# EAGLE board board (EAGLE 9.0.1)
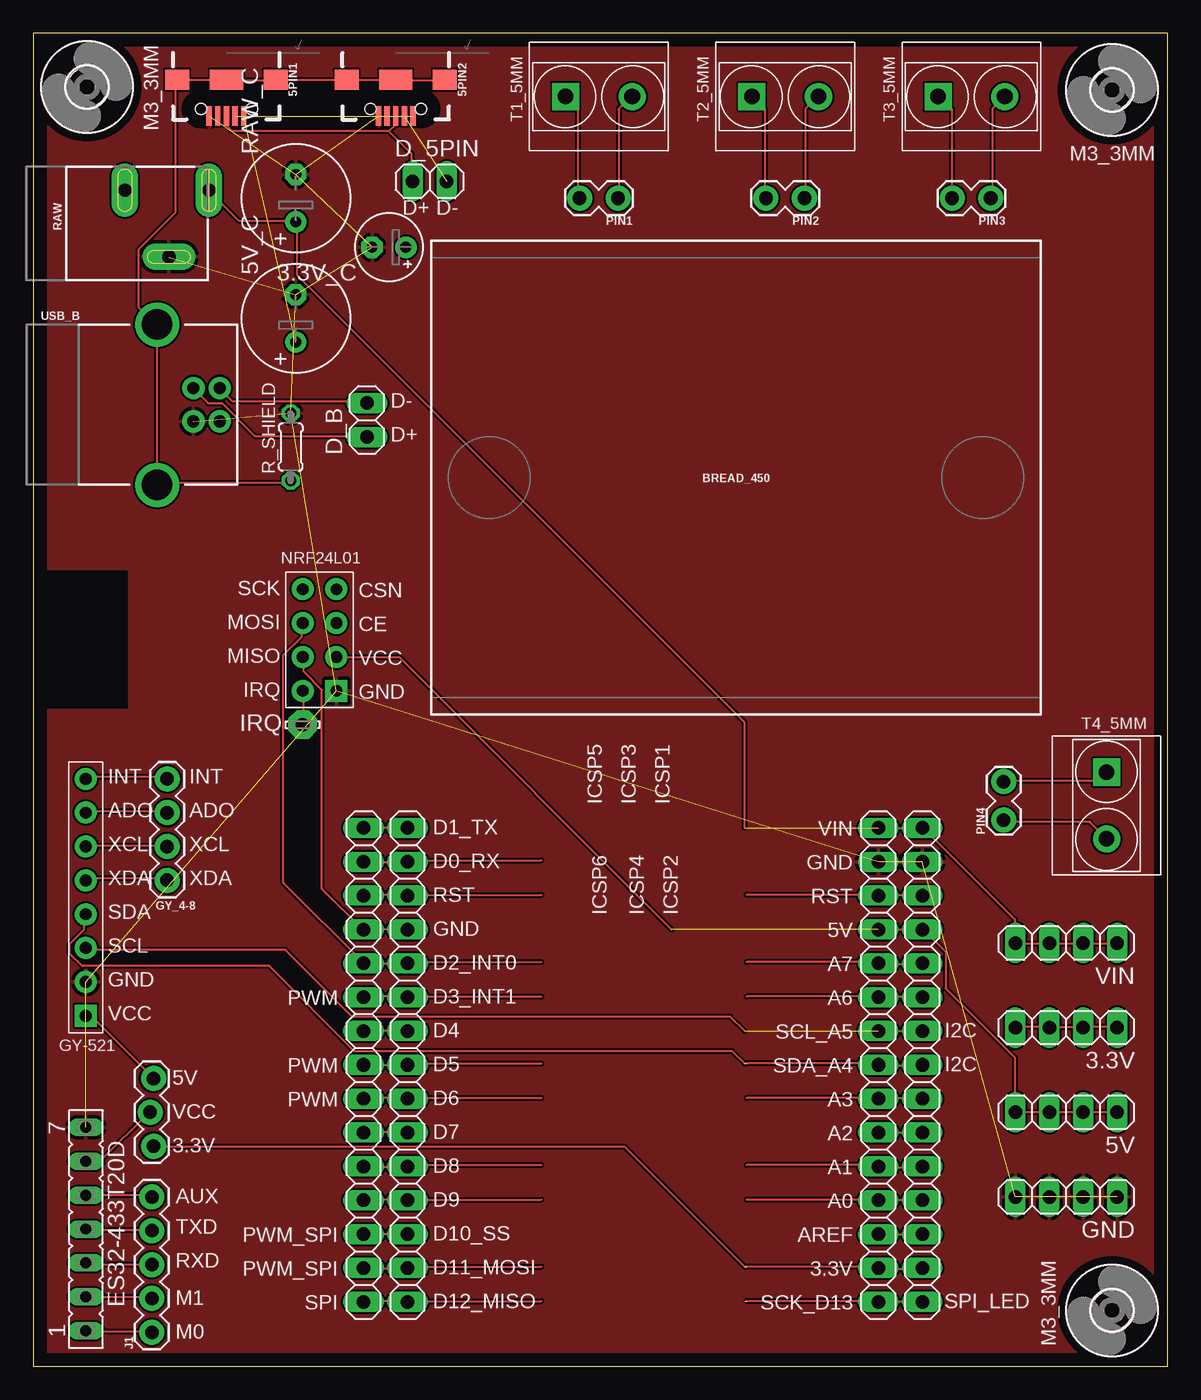
[diagram p0: board, top side]
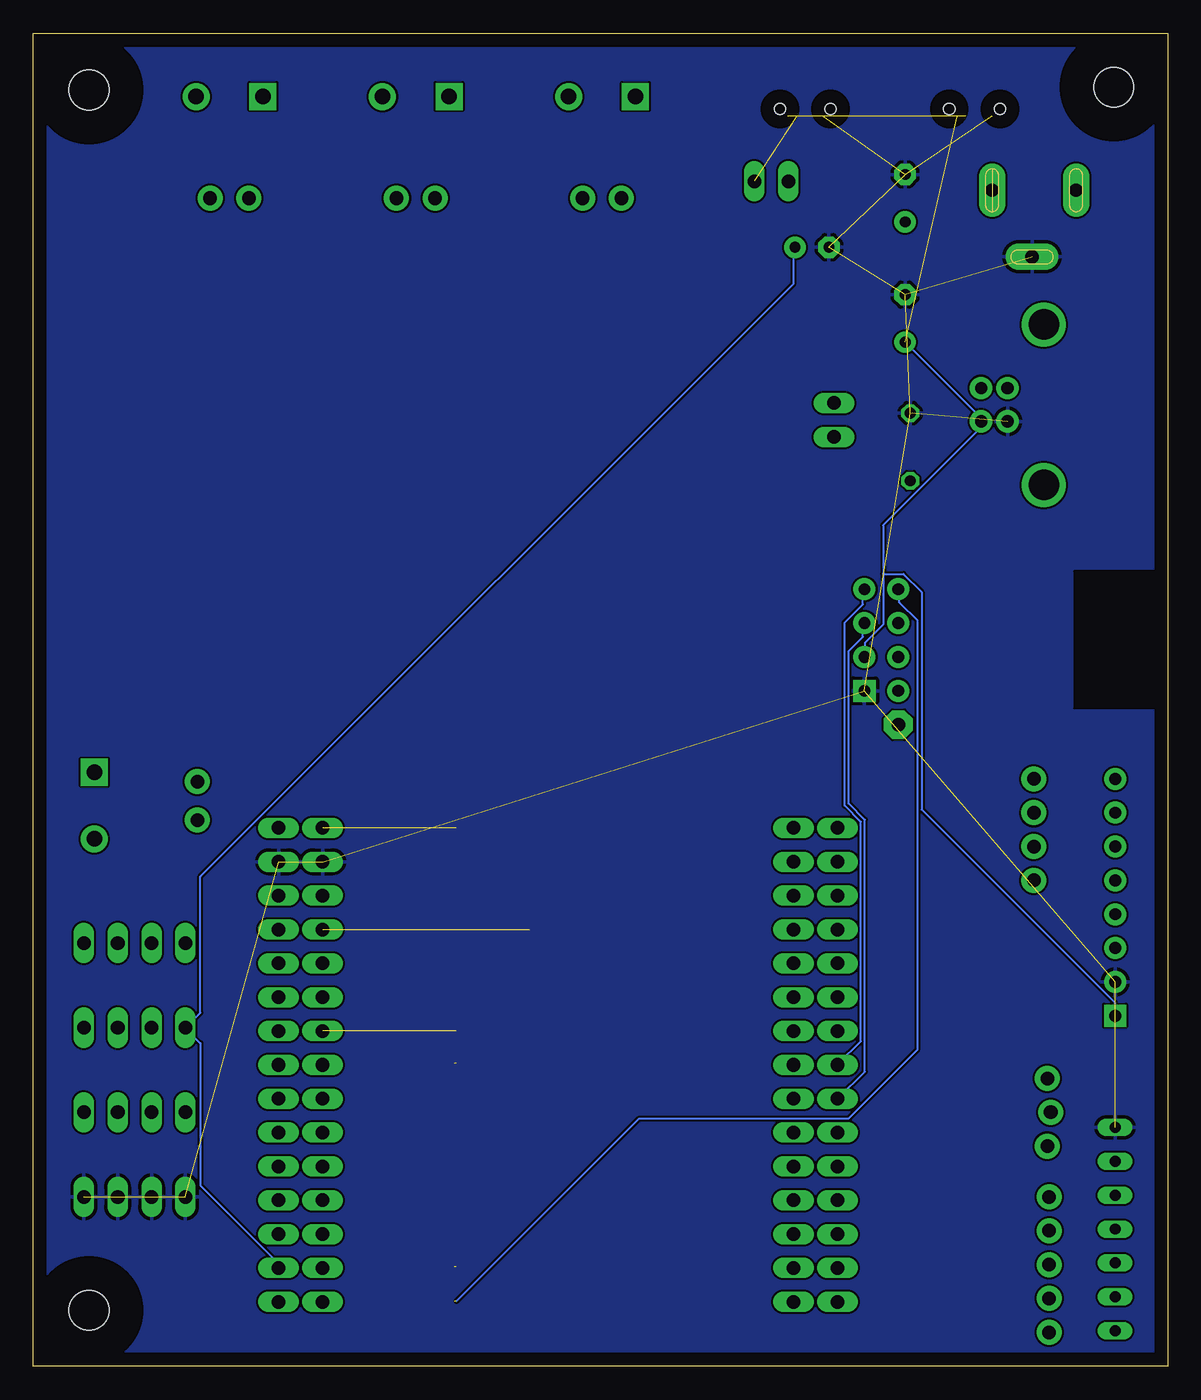
[diagram p1: board, bottom side, seen from below]

Size 85.07 x 100 mm. Coordinates in mm from the lower left corner, seen from the top.
Outline: 0,0 85.07,0 85.07,100 0,100 0,0
Copper layers (1*16): Top 0.035mm / dielectric 1.5mm / Bottom 0.035mm
Design rules "default": minimum track width 6mil, minimum drill 0.35mm, track to track 6mil, track to pad 6mil, pad to pad 6mil, via to via 6mil, smd to smd 6mil, copper to edge 40mil, drill to drill 6mil, minimum pad ring 10mil, minimum via ring 8mil, stop-mask expansion 4mil, vias tented up to drill 0mil, thermal gap 10mil
tRestrict: area 1,49.4 to 7,59.6
bRestrict: area 1,49.4 to 7,59.6

## Footprints (pad centres in the part's own frame; a part is rotated, then mirrored left to right if it is on the bottom)
1X03_LOCK = drill 1.016 pad 1.88: 1 0,0.127; 2 2.54,-0.127; 3 5.08,0.127
1X04 = drill 1.016 long: 1 -3.81,0; 2 -1.27,0; 3 1.27,0; 4 3.81,0
E2,5-5 = drill 0.813 pad 1.6: + -1.27,0 | drill 0.813 pad 1.6 octagon: - 1.27,0
USB-B-MICRO-SMD = smd 1.45 x 0.4: D+ 2.725,0; D- 2.725,0.65; GND 2.725,-1.3; ID 2.725,-0.65; VBUS 2.725,1.3 | smd 1.5 x 1.8: SHIELD1 0,3.685; SHIELD2 0,-3.685 | smd 1.5 x 2.5: SHIELD3 0,0 | hole 0.85: 2.2,1.9; 2.2,-1.9
E3,5-8 = drill 0.813 pad 1.6: + -1.778,0 | drill 0.813 pad 1.6 octagon: - 1.778,0
1X02 = drill 1.016 long: 1 -1.27,0; 2 1.27,0
FE07 = drill 0.813 long: 1 -7.62,0; 2 -5.08,0; 3 -2.54,0; 4 0,0; 5 2.54,0; 6 5.08,0; 7 7.62,0
H8-2.54 = drill 0.889 pad 1.651 square: 1 0,8.89 | drill 0.889 pad 1.651: 2 0,6.35; 3 0,3.81; 4 0,1.27; 5 0,-1.27; 6 0,-3.81; 7 0,-6.35; 8 0,-8.89
1X04' = drill 1.016 pad 1.88: 1 0,0; 2 2.54,0; 3 5.08,0; 4 7.62,0
3,0 = hole 3: 0,0
LSP10 = drill 1.016 pad 2.159 octagon: MP 0,0
1X05 = drill 1.016 pad 1.88: 1 0,0; 2 2.54,0; 3 5.08,0; 4 7.62,0; 5 10.16,0
H2X4-2.54 = drill 0.889 pad 1.651 square: 1 -1.27,3.81 | drill 0.889 pad 1.651: 2 -1.27,1.27; 3 -1.27,-1.27; 4 -1.27,-3.81; 5 1.27,-3.81; 6 1.27,-1.27; 7 1.27,1.27; 8 1.27,3.81
1X02_LOCK = drill 1.016 pad 1.88: 1 -0.178,0; 2 2.718,0
0204/5 = drill 0.813 octagon: 1 -2.54,0; 2 2.54,0
POWER_JACK_SLOT = drill 1 pad 2 long: GND@1 2.58,7.5; GND@2 7.58,10.8; PWR 2.58,13.8
1X15 = drill 1.016 long: 1 -17.78,0; 2 -15.24,0; 3 -12.7,0; 4 -10.16,0; 5 -7.62,0; 6 -5.08,0; 7 -2.54,0; 8 0,0; 9 2.54,0; 10 5.08,0; 11 7.62,0; 12 10.16,0; 13 12.7,0; 14 15.24,0; 15 17.78,0
H2-5.0-10.5X8.0MM = drill 1.168 pad 2.032 square: 1 0,2.5 | drill 1.168 pad 2.032: 2 0,-2.5
ABK-PRO-MINI = drill 0.8 long: A0 10.16,-3.81; A1 10.16,-6.35; A2 10.16,-8.89; A3 10.16,-11.43; A6 3.81,-21.59; A7 6.35,-21.59; D2 -5.08,-3.81; D3 -5.08,-6.35; D4 -5.08,-8.89; D5 -5.08,-11.43; D6 -5.08,-13.97; D7 -5.08,-16.51; D8 -5.08,-19.05; D9 -5.08,-21.59; D10 10.16,-21.59; D11 10.16,-19.05; D12 10.16,-16.51; D13 10.16,-13.97; DTR 8.89,8.89; GND 10.16,3.81; GND1 -5.08,-1.27; GND2 -3.81,8.89; GND3 -1.27,8.89; GND4 1.27,-21.59; RAW 10.16,6.35; RST 10.16,1.27; RST1 -5.08,1.27; RX1 -5.08,3.81; RX1-1 3.81,8.89; TX0 -5.08,6.35; TX0-1 6.35,8.89; VCC 10.16,-1.27; VCC1 1.27,8.89 | drill 0.8: A4 6.35,-5.08; A5 6.35,-2.54
USB-B-PTH = drill 0.914 pad 1.676: D+ 4,1.25; D- 5.981,1.25; GND 4,-1.25; VBUS 5.981,-1.25 | drill 2.286: SHLD1 1.282,-6.02; SHLD2 1.282,6.02

## Placement (x,y rotation side)
3.3/5  [1X03_LOCK]  8.89,21.59 270 top
3.3V  [1X04]  77.47,25.4 180 top
3.3V_C  [E2,5-5]  26.67,83.95 180 top
5PIN1  [USB-B-MICRO-SMD]  14.48,96.52 270 top
5PIN2  [USB-B-MICRO-SMD]  27.18,96.52 270 top
5V  [1X04]  77.47,19.05 180 top
5V_C  [E3,5-8]  19.68,78.61 90 top
BREAD_450  BREADBOARDMINI  [BREADBOARD-MINI]  52.7,66.67 180 top
D_5PIN  [1X02]  29.72,88.9 0 top
D_B  [1X02]  25.02,70.99 90 top
ES32-433T20D  [FE07]  3.94,10.29 90 top
GND  [1X04]  77.47,12.7 180 top
GY-521  [H8-2.54]  3.94,35.18 180 top
GY_4-8  [1X04']  10.03,44.07 270 top
H1  MOUNT-HOLE3.0  [3,0]  80.9,95.76 0 top
H2  MOUNT-HOLE3.0  [3,0]  80.9,4.19 0 top
H3  MOUNT-HOLE3.0  [3,0]  4.04,95.96 0 top
IRQ  LSP10  [LSP10]  20.19,48.13 180 top
J1  [1X05]  8.89,2.54 90 top
NRF24L01  [H2X4-2.54]  21.46,54.48 180 top
PIN1  [1X02_LOCK]  43.69,87.63 180 top
PIN2  [1X02_LOCK]  57.66,87.63 180 top
PIN3  [1X02_LOCK]  71.63,87.63 180 top
PIN4  [1X02_LOCK]  72.77,41.15 90 top
R_SHIELD  10k  [0204/5]  19.3,68.96 90 top
RAW  [POWER_JACK_SLOT]  -0.64,90.81 270 top
RAW-D13_1  [1X15]  63.37,22.61 90 top
RAW-D13_2  [1X15]  66.67,22.61 90 top
RAW_C  [E3,5-8]  19.68,87.63 90 top
T1_5MM  5mm  [H2-5.0-10.5X8.0MM]  42.42,95.25 90 top
T2_5MM  5mm  [H2-5.0-10.5X8.0MM]  56.39,95.25 90 top
T3_5MM  5mm  [H2-5.0-10.5X8.0MM]  70.36,95.25 90 top
T4_5MM  5mm  [H2-5.0-10.5X8.0MM]  80.49,42.06 0 top
TX0-D12_1  [1X15]  24.77,22.61 90 top
TX0-D12_2  [1X15]  28.07,22.61 90 top
U$1  ABK-PRO-MINI  [ABK-PRO-MINI]  -24.13,21.34 0 top  (outside the outline)
USB_B  [USB-B-PTH]  8,72.14 0 top
VIN  [1X04]  77.47,31.75 180 top

## Library data of the parts
3.3/5 J1 PIN1-PIN4 = SparkFun-Connectors
3.3V 5V D_5PIN D_B GND RAW-D13_1 RAW-D13_2 TX0-D12_1 TX0-D12_2 VIN = pinhead
3.3V_C = rcl; SPICEPREFIX: C
5PIN1 5PIN2 = SparkFun-Connectors; PROD_ID: CONN-11752
5V_C R_SHIELD RAW_C = resistor
BREAD_450 = SparkFun-Boards; PROD_ID: COMP-12034
ES32-433T20D = con-lsta; OC_FARNELL: unknown; OC_NEWARK: unknown
GY-521 = Seeed-Connector; MPN: F185-1108A1BSYC1
GY_4-8 = SparkFun-Connectors; PROD_ID: CONN-09696
H1-H3 = holes
IRQ = solpad
NRF24L01 T1_5MM T2_5MM T3_5MM T4_5MM = Seeed-Connector
RAW = SparkFun-Connectors; PROD_ID: PRT-00119
U$1 = Arduino-clone
USB_B = SparkFun-Connectors; PROD_ID: CONN-08278; SF_ID: PRT-00139

## Nets
3.3V: 3.3/5.3 3.3V.1 3.3V.2 3.3V.3 3.3V.4 3.3V_C.+ RAW-D13_1.2 RAW-D13_2.2
5V: 3.3/5.1 5PIN1.VBUS 5PIN2.VBUS 5V.1 5V.2 5V.3 5V.4 5V_C.+ GY-521.1 NRF24L01.2 RAW-D13_1.12 RAW-D13_2.12 USB_B.VBUS
A5: GY-521.3 RAW-D13_1.9 RAW-D13_2.9
A6: RAW-D13_1.10 RAW-D13_2.10
A7: RAW-D13_1.11 RAW-D13_2.11
CE_NRF: NRF24L01.3 TX0-D12_1.7 TX0-D12_2.7
CSN_NRF: NRF24L01.4 TX0-D12_1.8 TX0-D12_2.8
D+_5PIN: 5PIN1.D+ 5PIN2.D+ D_5PIN.1
D+_B: D_B.1 USB_B.D+
D-_5PIN: 5PIN1.D- 5PIN2.D- D_5PIN.2
D-_B: D_B.2 USB_B.D-
GND: 3.3V_C.- 5PIN1.GND 5PIN2.GND 5V_C.- ES32-433T20D.7 GND.1 GND.2 GND.3 GND.4 GY-521.2 NRF24L01.1 R_SHIELD.2 RAW-D13_1.14 RAW-D13_2.14 RAW.GND@2 RAW_C.- USB_B.GND
MISO_NRF: NRF24L01.7 TX0-D12_1.12 TX0-D12_2.12
MOSI_NRF: NRF24L01.6 TX0-D12_1.11 TX0-D12_2.11
N$1: IRQ.MP NRF24L01.8
N$2: GY-521.5 GY_4-8.4
N$3: RAW-D13_1.3 RAW-D13_2.3
N$4: RAW-D13_1.4 RAW-D13_2.4
N$5: RAW-D13_1.5 RAW-D13_2.5
N$6: RAW-D13_1.6 RAW-D13_2.6
N$7: RAW-D13_1.7 RAW-D13_2.7
N$8: GY-521.6 GY_4-8.3
N$9: GY-521.7 GY_4-8.2
N$10: GY-521.8 GY_4-8.1
N$11: 3.3/5.2 ES32-433T20D.6
N$12: ES32-433T20D.1 J1.1
N$13: ES32-433T20D.2 J1.2
N$14: ES32-433T20D.3 J1.3
N$15: ES32-433T20D.4 J1.4
N$16: TX0-D12_1.1 TX0-D12_2.1
N$17: TX0-D12_1.2 TX0-D12_2.2
N$18: TX0-D12_1.3 TX0-D12_2.3
N$19: TX0-D12_1.4 TX0-D12_2.4
N$20: TX0-D12_1.5 TX0-D12_2.5
N$21: TX0-D12_1.6 TX0-D12_2.6
N$22: ES32-433T20D.5 J1.5
N$23: PIN1.2 T1_5MM.1
N$24: TX0-D12_1.9 TX0-D12_2.9
N$25: TX0-D12_1.10 TX0-D12_2.10
N$26: PIN1.1 T1_5MM.2
N$27: PIN2.2 T2_5MM.1
N$28: TX0-D12_1.13 TX0-D12_2.13
N$29: TX0-D12_1.14 TX0-D12_2.14
N$30: TX0-D12_1.15 TX0-D12_2.15
N$31: PIN2.1 T2_5MM.2
N$32: PIN3.2 T3_5MM.1
N$33: PIN3.1 T3_5MM.2
N$34: PIN4.2 T4_5MM.1
N$35: PIN4.1 T4_5MM.2
RST: RAW-D13_1.13 RAW-D13_2.13
SCK_NRF: NRF24L01.5 RAW-D13_1.1 RAW-D13_2.1
SDA_GY521: GY-521.4 RAW-D13_1.8 RAW-D13_2.8
SHIELD_IN: 5PIN1.SHIELD1 5PIN1.SHIELD2 5PIN1.SHIELD3 5PIN2.SHIELD1 5PIN2.SHIELD2 5PIN2.SHIELD3 R_SHIELD.1 USB_B.SHLD1 USB_B.SHLD2
VIN: RAW-D13_1.15 RAW-D13_2.15 RAW.PWR RAW_C.+ VIN.1 VIN.2 VIN.3 VIN.4

## Tracks (layer width: path | path; a pad name or v marks a point on that pad's centre or on a via)
3.3V  (1 unrouted)
  Top 0.152: 53.49,7.47 63.25,7.47 RAW-D13_1.2 63.4,7.32 66.6,7.32 RAW-D13_2.2 | 53.34,7.47 44.35,16.46 9.14,16.46 3.3/5.3 | 3.3V.1 81.23,25.45 78.79,25.45 3.3V.2 78.64,25.45 76.2,25.45 | 76.2,25.45 73.76,25.45 3.3V.4 | 76.2,25.45 3.3V.3
  Bottom 0.152: 3.3V_C.+ 28.04,83.82 28.04,81.23 72.54,36.73 72.54,26.52 3.3V.4 73.61,25.3 72.54,24.23 72.54,13.56 66.75,7.77 66.75,7.47 RAW-D13_2.2
5V  (3 unrouted)
  Top 0.152: 5V.1 5V.2 5V.3 5V.4 73.61,19.05 73.61,23.16 68.43,28.35 68.43,31.09 66.75,32.77 RAW-D13_2.12 RAW-D13_1.12 | GY-521.1 3.96,26.21 4.42,26.21 8.99,21.64 3.3/5.1 | 47.85,32.77 27.43,53.19 22.86,53.19 NRF24L01.2
  Bottom 0.152: 5V_C.+ 13.87,71.02 USB_B.VBUS 14.02,70.87 14.02,70.41 21.34,63.09 21.34,59.44 | 21.34,59.44 21.34,55.63 22.71,54.25 22.71,53.34 NRF24L01.2 | 21.34,59.44 19.81,59.44 18.44,58.06 18.44,41.76 3.96,27.28 3.96,26.36 GY-521.1
A5  (1 unrouted)
  Top 0.152: RAW-D13_1.9 RAW-D13_2.9 | 53.34,25.15 52.27,26.21 23.93,26.21 18.9,31.24 3.96,31.24 GY-521.3
A6
  Top 0.152: 53.49,27.74 63.25,27.74 RAW-D13_1.10 63.4,27.74 66.6,27.74 RAW-D13_2.10
A7
  Top 0.152: 53.49,30.33 63.25,30.33 RAW-D13_1.11 63.4,30.18 66.6,30.18 RAW-D13_2.11
CE_NRF
  Top 0.152: 38.1,20.12 28.19,20.12 TX0-D12_2.7 28.04,20.12 24.84,20.12 TX0-D12_1.7
  Bottom 0.152: NRF24L01.3 22.86,55.63 22.86,54.71 23.93,53.65 23.93,42.22 22.71,41 22.71,22.1 24.69,20.12 TX0-D12_1.7
CSN_NRF
  Top 0.152: 38.1,22.71 28.19,22.71 TX0-D12_2.8 28.04,22.55 24.84,22.55 TX0-D12_1.8
  Bottom 0.152: NRF24L01.4 22.86,58.22 22.86,57.15 24.23,55.78 24.23,42.06 23.01,40.84 23.01,24.38 24.69,22.71 TX0-D12_1.8
D+_5PIN
  Top 0.152: 5PIN1.D+ 14.48,93.12 14.94,92.66 26.67,92.66 | 26.67,92.66 27.13,93.12 27.13,93.73 5PIN2.D+ | 26.67,92.66 28.35,90.98 28.35,89 D_5PIN.1
D+_B
  Top 0.152: D_B.1 24.99,69.8 16.61,69.8 14.17,72.24 13.11,72.24 12.04,73.3 USB_B.D+
D-_5PIN  (2 unrouted)
D-_B
  Top 0.152: D_B.2 24.99,72.39 14.94,72.39 14.02,73.3 USB_B.D-
GND  (16 unrouted)
  pour Top: 85.09,99.95 85.09,0 0,0 0,99.95
  pour Bottom: 0,0 85.09,0.13 85.09,99.95 0,99.82
MISO_NRF
  Top 0.152: TX0-D12_2.12 TX0-D12_1.12 24.69,32.77 21.64,35.81 21.64,50.75 20.27,52.12 20.27,53.19 NRF24L01.7
MOSI_NRF
  Top 0.152: 38.1,30.33 28.19,30.33 TX0-D12_2.11 28.04,30.18 24.84,30.18 TX0-D12_1.11 24.69,30.33 18.75,36.27 18.75,53.34 20.12,54.71 20.12,55.63 NRF24L01.6
N$1
  Top 0.152: NRF24L01.8 20.27,50.6 20.27,48.16 IRQ.MP
N$2
  Top 0.152: GY-521.5 3.96,36.58 9.91,36.58 GY_4-8.4
N$3
  Top 0.152: RAW-D13_1.3 RAW-D13_2.3
N$4
  Top 0.152: 53.49,12.5 63.25,12.5 RAW-D13_1.4 63.4,12.5 66.6,12.5 RAW-D13_2.4
N$5
  Top 0.152: 53.49,15.09 63.25,15.09 RAW-D13_1.5 63.4,14.94 66.6,14.94 RAW-D13_2.5
N$6
  Top 0.152: RAW-D13_1.6 RAW-D13_2.6
N$7
  Top 0.152: 53.49,20.12 63.25,20.12 RAW-D13_1.7 63.4,20.12 66.6,20.12 RAW-D13_2.7
N$8
  Top 0.152: GY-521.6 3.96,39.01 9.91,39.01 GY_4-8.3
N$9
  Top 0.152: GY-521.7 3.96,41.6 9.91,41.6 GY_4-8.2
N$10
  Top 0.152: GY-521.8 3.96,44.2 9.91,44.2 GY_4-8.1
N$11
  Top 0.152: ES32-433T20D.6 3.96,15.39 5.03,15.39 8.69,19.05 3.3/5.2
N$12
  Top 0.152: ES32-433T20D.1 3.96,2.59 8.84,2.59 J1.1
N$13
  Top 0.152: ES32-433T20D.2 3.96,5.18 8.84,5.18 J1.2
N$14
  Top 0.152: J1.3 3.96,7.62 ES32-433T20D.3
N$15
  Top 0.152: ES32-433T20D.4 3.96,10.21 8.84,10.21 J1.4
N$16
  Top 0.152: 38.1,4.88 28.19,4.88 TX0-D12_2.1 28.04,4.88 24.84,4.88 TX0-D12_1.1
N$17
  Top 0.152: 38.1,7.47 28.19,7.47 TX0-D12_2.2 28.04,7.32 24.84,7.32 TX0-D12_1.2
N$18
  Top 0.152: TX0-D12_2.3 TX0-D12_1.3
N$19
  Top 0.152: 38.1,12.5 28.19,12.5 TX0-D12_2.4 28.04,12.5 24.84,12.5 TX0-D12_1.4
N$20
  Top 0.152: 38.1,15.09 28.19,15.09 TX0-D12_2.5 28.04,14.94 24.84,14.94 TX0-D12_1.5
N$21
  Top 0.152: TX0-D12_2.6 TX0-D12_1.6
N$22
  Top 0.152: ES32-433T20D.5 3.96,12.8 8.84,12.8 J1.5
N$23
  Top 0.152: PIN1.2 40.84,87.63 40.84,94.34 T1_5MM.1
N$24
  Top 0.152: TX0-D12_2.9 TX0-D12_1.9
N$25
  Top 0.152: 38.1,27.74 28.19,27.74 TX0-D12_2.10 28.04,27.74 24.84,27.74 TX0-D12_1.10
N$26
  Top 0.152: PIN1.1 43.89,87.63 43.89,94.34 44.81,95.25 T1_5MM.2
N$27
  Top 0.152: PIN2.2 54.86,87.63 54.86,94.34 53.95,95.25 T2_5MM.1
N$28
  Top 0.152: 38.1,35.36 28.19,35.36 TX0-D12_2.13 28.04,35.36 24.84,35.36 TX0-D12_1.13
N$29
  Top 0.152: 38.1,37.95 28.19,37.95 TX0-D12_2.14 28.04,37.8 24.84,37.8 TX0-D12_1.14
N$30
  Top 0.152: TX0-D12_2.15 TX0-D12_1.15
N$31
  Top 0.152: PIN2.1 57.91,87.63 57.91,94.34 58.83,95.25 T2_5MM.2
N$32
  Top 0.152: PIN3.2 68.89,87.63 68.89,94.34 67.97,95.25 T3_5MM.1
N$33
  Top 0.152: PIN3.1 71.93,87.63 71.93,94.34 72.85,95.25 T3_5MM.2
N$34
  Top 0.152: PIN4.2 72.85,43.89 79.86,43.89 80.47,44.5 T4_5MM.1
N$35
  Top 0.152: PIN4.1 72.85,40.84 79.25,40.84 80.47,39.62 T4_5MM.2
RST
  Top 0.152: 53.49,35.36 63.25,35.36 RAW-D13_1.13 63.4,35.36 66.6,35.36 RAW-D13_2.13
SCK_NRF  (1 unrouted)
  Top 0.152: 53.49,4.88 63.25,4.88 RAW-D13_1.1 63.4,4.88 66.6,4.88 RAW-D13_2.1
  Bottom 0.152: 53.34,4.88 39.62,18.59 23.93,18.59 18.75,23.77 18.75,55.93 20.12,57.3 20.12,58.22 NRF24L01.5
SDA_GY521  (1 unrouted)
  Top 0.152: 53.49,22.71 63.25,22.71 RAW-D13_1.8 63.4,22.55 66.6,22.55 RAW-D13_2.8 | 53.34,22.71 52.43,23.62 24.08,23.62 17.68,30.02 3.66,30.02 2.74,30.94 2.74,31.7 3.81,32.77 3.81,33.83 GY-521.4
SHIELD_IN
  Top 0.152: 14.48,96.47 10.82,96.47 5PIN1.SHIELD2 10.67,96.47 10.67,86.56 7.92,83.82 7.92,79.4 9.14,78.18 USB_B.SHLD2 9.3,78.03 9.3,66.14 | 14.48,96.47 18.14,96.47 5PIN1.SHIELD1 18.29,96.47 23.47,96.47 5PIN2.SHIELD2 23.62,96.47 27.13,96.47 5PIN2.SHIELD3 27.28,96.47 30.79,96.47 5PIN2.SHIELD1 | 14.48,96.47 5PIN1.SHIELD3 | 9.3,66.14 9.45,66.29 19.2,66.29 R_SHIELD.1 | 9.3,66.14 USB_B.SHLD1
VIN  (1 unrouted)
  Top 0.152: RAW.PWR 13.26,88.09 15.39,85.95 19.66,85.95 RAW_C.+ 19.81,85.8 19.81,81.84 53.34,48.31 53.34,40.39 | 76.2,31.7 73.76,31.7 VIN.4 73.61,31.85 73.61,33.53 66.75,40.39 RAW-D13_2.15 RAW-D13_1.15 | VIN.1 81.23,31.7 78.79,31.7 VIN.2 78.64,31.7 76.2,31.7 | 76.2,31.7 VIN.3

## Text on the board
tPlace: M3_3MM | M3_3MM | D+ | D- | D- | D+ | SCK | CSN | MOSI | CE | MISO | VCC | IRQ | GND | INT | INT | ICSP5 | ICSP3 | ICSP1 | ADO | ADO | VIN | D1_TX | XCL | XCL | ICSP6 | ICSP4 | ICSP2 | GND | D0_RX | XDA | XDA | RST | RST | SDA | 5V | GND | SCL | A7 | D2_INT0 | GND | PWM | A6 | D3_INT1 | VCC | SCL_A5 | D4 | I2C | PWM | SDA_A4 | D5 | I2C | 5V | PWM | A3 | D6 | VCC | A2 | D7 | 3.3V | A1 | D8 | A0 | AUX | D9 | TXD | PWM_SPI | AREF | D10_SS | PWM_SPI | 3.3V | RXD | D11_MOSI | M1 | SPI | SCK_D13 | D12_MISO | SPI_LED | M0 | M3_3MM
silktop: TOP
silkbottom: BOT